# EAGLE board RS232 (EAGLE 5.06)
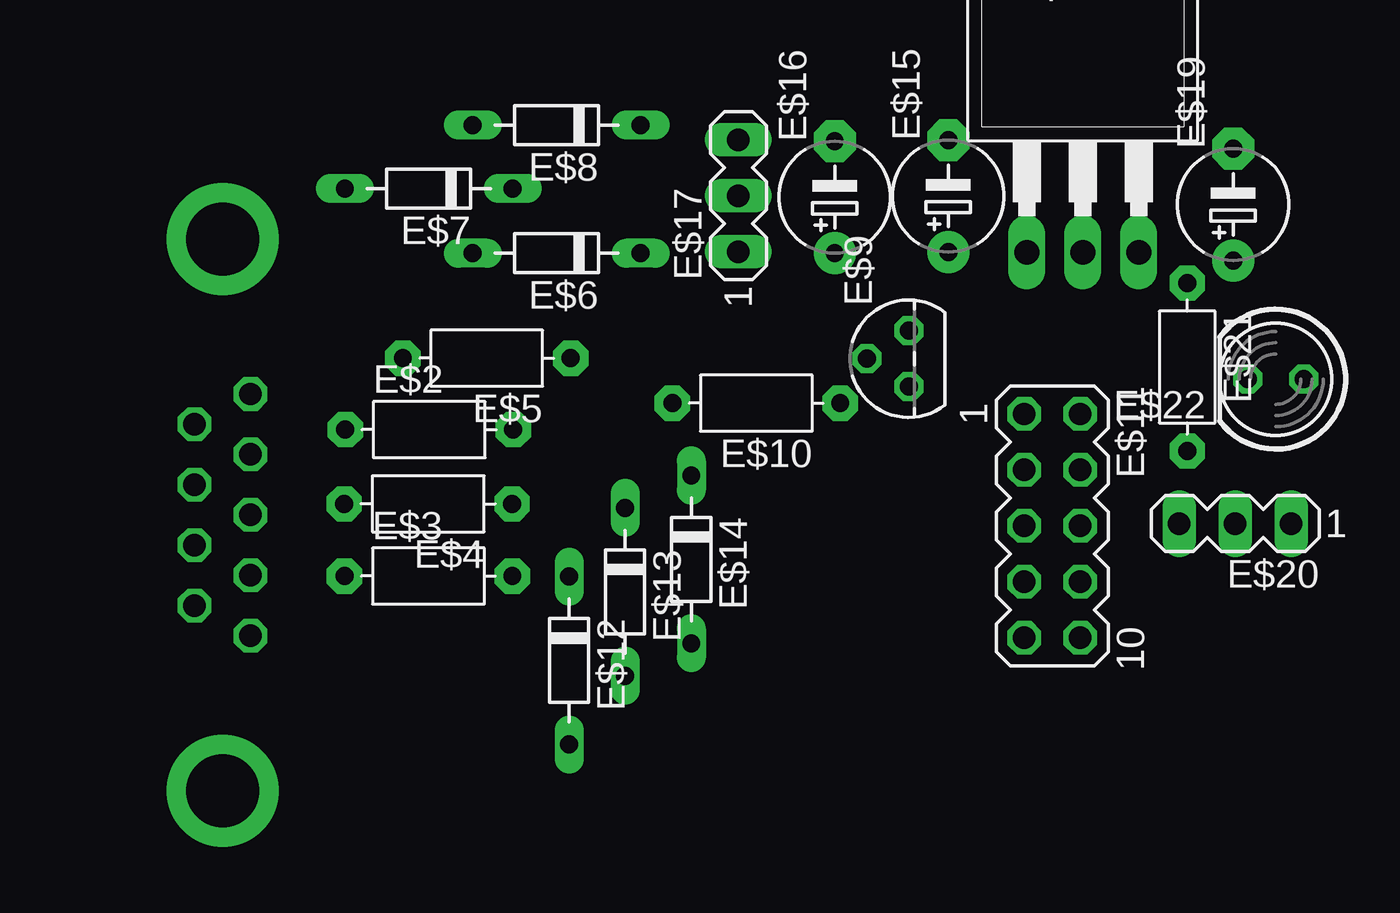
[diagram p0: board, top side]
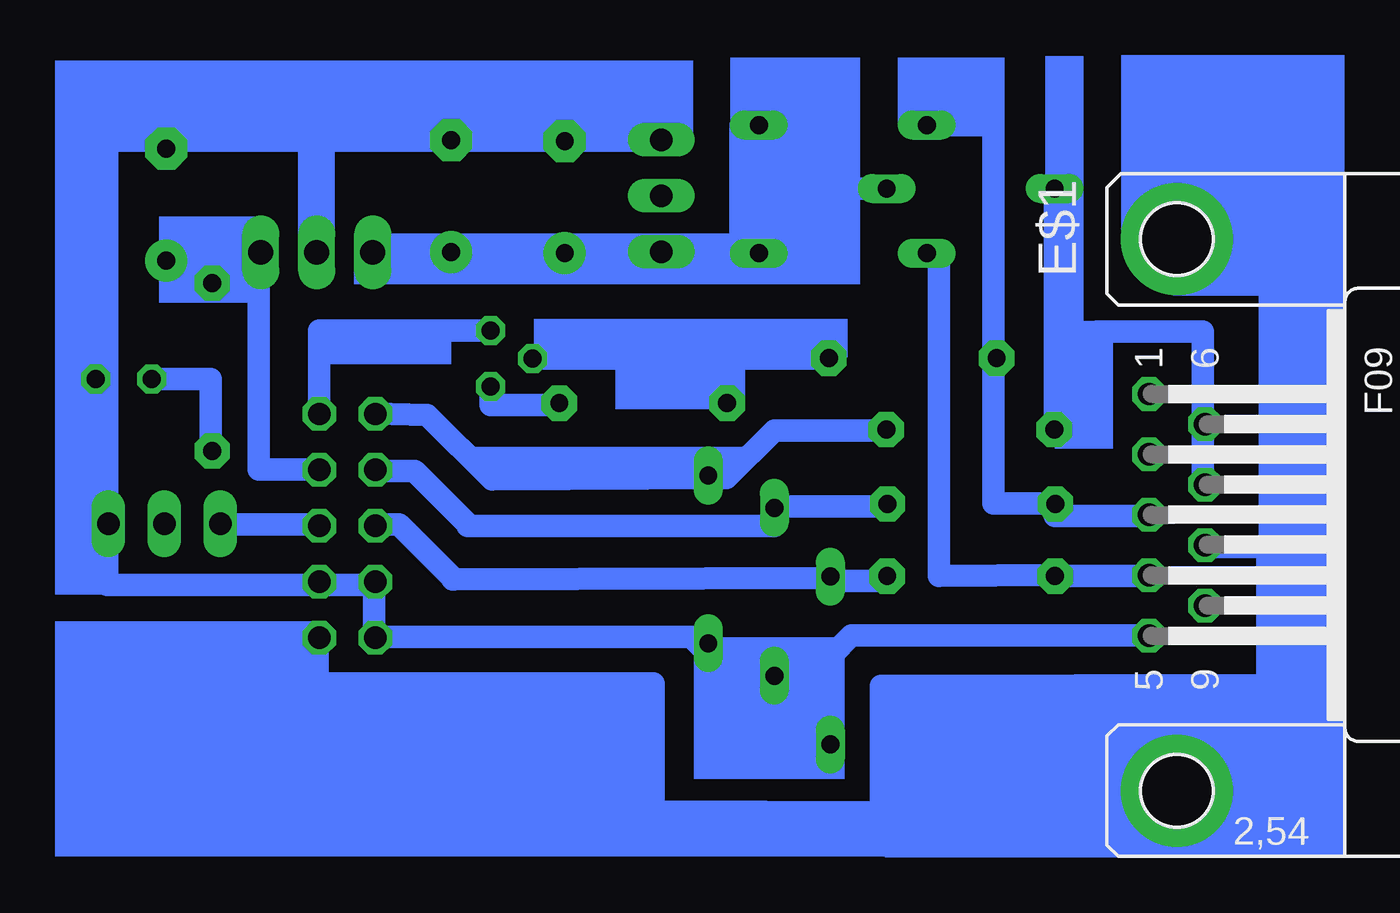
[diagram p1: board, bottom side, seen from below]

No outline drawn. Coordinates in mm, seen from the top.
Copper layers (1*16): Top 0.035mm / dielectric 1.5mm / Bottom 0.035mm
Design rules "default": minimum track width 10mil, minimum drill 24mil, track to track 8mil, track to pad 8mil, pad to pad 8mil, via to via 8mil, smd to smd 8mil, copper to edge 40mil, drill to drill 8mil, minimum pad ring 10mil, minimum via ring 8mil, stop-mask expansion 4mil, vias tented up to drill 0mil, thermal gap 10mil

## Footprints (pad centres in the part's own frame; a part is rotated, then mirrored left to right if it is on the bottom)
F09HP = drill 1.016 octagon: 1 -5.486,-1.27; 2 -2.743,-1.27; 3 0,-1.27; 4 2.743,-1.27; 5 5.486,-1.27; 6 -4.115,1.27; 7 -1.372,1.27; 8 1.372,1.27; 9 4.115,1.27 | drill 3.302 pad 5.08 round: G1 -12.522,0; G2 12.522,0
R-7,5 = drill 0.813 pad 1.6 octagon: 1 -3.81,0; 2 3.81,0
D-7.5 = drill 0.813 long: A 3.81,0; C -3.81,0
TO92 = drill 0.813 octagon: 1 -1.27,0; 2 0,1.905; 3 1.27,0
MA05-2 = drill 1.016 octagon: 1 -5.08,-1.27; 2 -5.08,1.27; 3 -2.54,-1.27; 4 -2.54,1.27; 5 0,-1.27; 6 0,1.27; 7 2.54,-1.27; 8 2.54,1.27; 9 5.08,-1.27; 10 5.08,1.27
E5-5 = drill 0.813 pad 1.905 round: + -2.54,0 | drill 0.813 pad 1.905 octagon: - 2.54,0
MA03-1 = drill 1.016 long: 1 -2.54,0; 2 0,0; 3 2.54,0
TO220 = drill 1.118 long: 1 -2.54,-6.35; 2 0,-6.35; 3 2.54,-6.35 | hole 3.302: 0,11.176
LED5MM = drill 0.813 octagon: A -1.27,0; K 1.27,0

## Placement (x,y rotation side)
E$1  [F09HP]  12.7,16.51 270 bottom
E$2  [R-7,5]  22.08,20.38 0 top
E$3  [R-7,5]  22.04,13.73 0 top
E$4  [R-7,5]  22.03,17.01 180 top
E$5  [R-7,5]  24.69,23.62 180 top
E$6  [D-7.5]  27.86,28.39 180 top
E$7  [D-7.5]  22.06,31.32 180 top
E$8  [D-7.5]  27.86,34.2 180 top
E$9  [TO92]  43.84,23.6 90 top
E$10  [R-7,5]  36.92,21.58 180 top
E$11  [MA05-2]  50.35,16.01 270 top
E$12  [D-7.5]  28.43,9.9 270 top
E$13  [D-7.5]  30.97,13.02 270 top
E$14  [D-7.5]  33.97,14.49 270 top
E$15  [E5-5]  45.63,30.98 90 top
E$16  [E5-5]  40.48,30.93 90 top
E$17  [MA03-1]  36.11,30.99 90 top
E$18  [TO220]  51.74,34.77 0 top
E$19  [E5-5]  58.56,30.6 90 top
E$20  [MA03-1]  58.65,16.11 180 top
E$21  [R-7,5]  56.48,23.22 270 top
E$22  [LED5MM]  60.49,22.67 180 top

## Library data of the parts
E$1 = con-subd
E$2-E$5 E$10 E$21 = discrete
E$6-E$8 E$12-E$14 = diode
E$9 = linear
E$11 E$17 E$20 = con-lstb
E$15 E$16 E$19 = rcl
E$18 = transistor-fet
E$22 = led

## Nets
S$26: E$11.6

## Tracks (layer width: path | path; a pad name or v marks a point on that pad's centre or on a via)
S$1
  Bottom 1.016: 11.4,17.83 11.52,17.83 11.52,24.84 16.34,24.84
S$2
  Bottom 1.016: 18.29,13.73 13.9,13.73 13.9,13.85
S$3
  Bottom 1.016: 41.87,23.6 33.14,23.6 | 33.14,23.6 28.55,23.6 28.55,23.67 | 33.14,21.56 33.14,23.6
S$4
  Bottom 1.016: 18.23,20.41 18.23,24.81 16.25,24.81
S$5
  Bottom 1.016: 18.23,13.78 23.51,13.75 23.51,28.36
S$6
  Bottom 1.016: 23.71,34.19 21.03,34.19 21.03,17.03 18.23,17.03 | 13.96,16.46 18.23,16.46 18.23,17.03 | 18.23,17.03 18.23,17.1
S$7
  Bottom 1.016: 18.16,24.88 18.23,24.88 18.23,31.19
S$8
  Bottom 1.016: 25.88,31.32 31.36,31.32 31.36,34.13 31.55,34.13 31.55,28.26
S$9
  Bottom 1.016: 43.85,22.33 43.85,21.5 40.73,21.5
S$10
  Bottom 1.016: 25.81,13.71 25.81,13.52 28.43,13.52
S$11
  Bottom 1.016: 25.75,16.97 25.75,16.9 30.97,16.9 | 30.97,16.9 31.04,16.9 | 30.97,16.9 30.97,16.01 44.88,16.01
S$12
  Bottom 1.016: 28.43,13.65 45.58,13.59
S$13
  Bottom 1.016: 25.88,20.35 30.97,20.35 33.14,18.18 43.79,18.11 46.72,21.04 49.14,21.11
S$14
  Bottom 1.016: 34.1,10.46 28.3,10.46 28.3,5.87
S$15
  Bottom 1.016: 49.14,10.97 34.74,10.97 33.08,9.31
S$16
  Bottom 1.016: 51.69,10.91 51.69,8.87 36.46,8.87 36.46,3.06 26.13,3 26.13,8.74 8.6,8.8 8.6,15.05 11.47,15.05
S$17
  Bottom 1.016: 13.96,11.04 27.46,11.04 28.36,10.14
S$18
  Bottom 1.016: 43.85,24.88 51.63,24.88 51.63,21.05
S$19
  Bottom 1.016: 44.87,16.07 47.3,18.5 49.14,18.5
S$20
  Bottom 1.016: 45.51,13.59 47.99,16.07 49.27,16.07
S$21
  Bottom 1.016: 49.27,28.32 31.29,28.32
S$22
  Bottom 1.016: 59.29,22.67 56.54,22.67 56.54,19.36
S$23
  Bottom 1.016: 54.37,28.51 54.37,18.56 51.62,18.56
S$24
  Bottom 1.016: 58.51,28.07 58.51,28 54.3,28
S$25
  Bottom 1.016: 49.14,10.91 49.14,13.33 61.25,13.33 61.25,33.49 58.38,33.49 | 35.82,33.49 51.69,33.49 | 51.69,33.49 51.75,33.49 51.75,28.45 | 51.69,33.49 58.38,33.49 | 58.38,33.49 58.57,33.49 58.57,33.23
S$26
  Bottom 1.016: E$11.6 51.62,16.07 56.15,16.07
(copper drawn outside any net)
  shapes: Bottom area x25